# Altium PCB E4_TPF.PcbDoc
Units mil, origin at the board's own origin, x right, y up, seen from the top; angles counter-clockwise.
Board outline 7890 x 4000 mil, 2 copper layers (Top Layer, Bottom Layer); 88 components, 47 nets, 254 pads, 28 vias.
Unrouted connection lines stored in the file: 1.
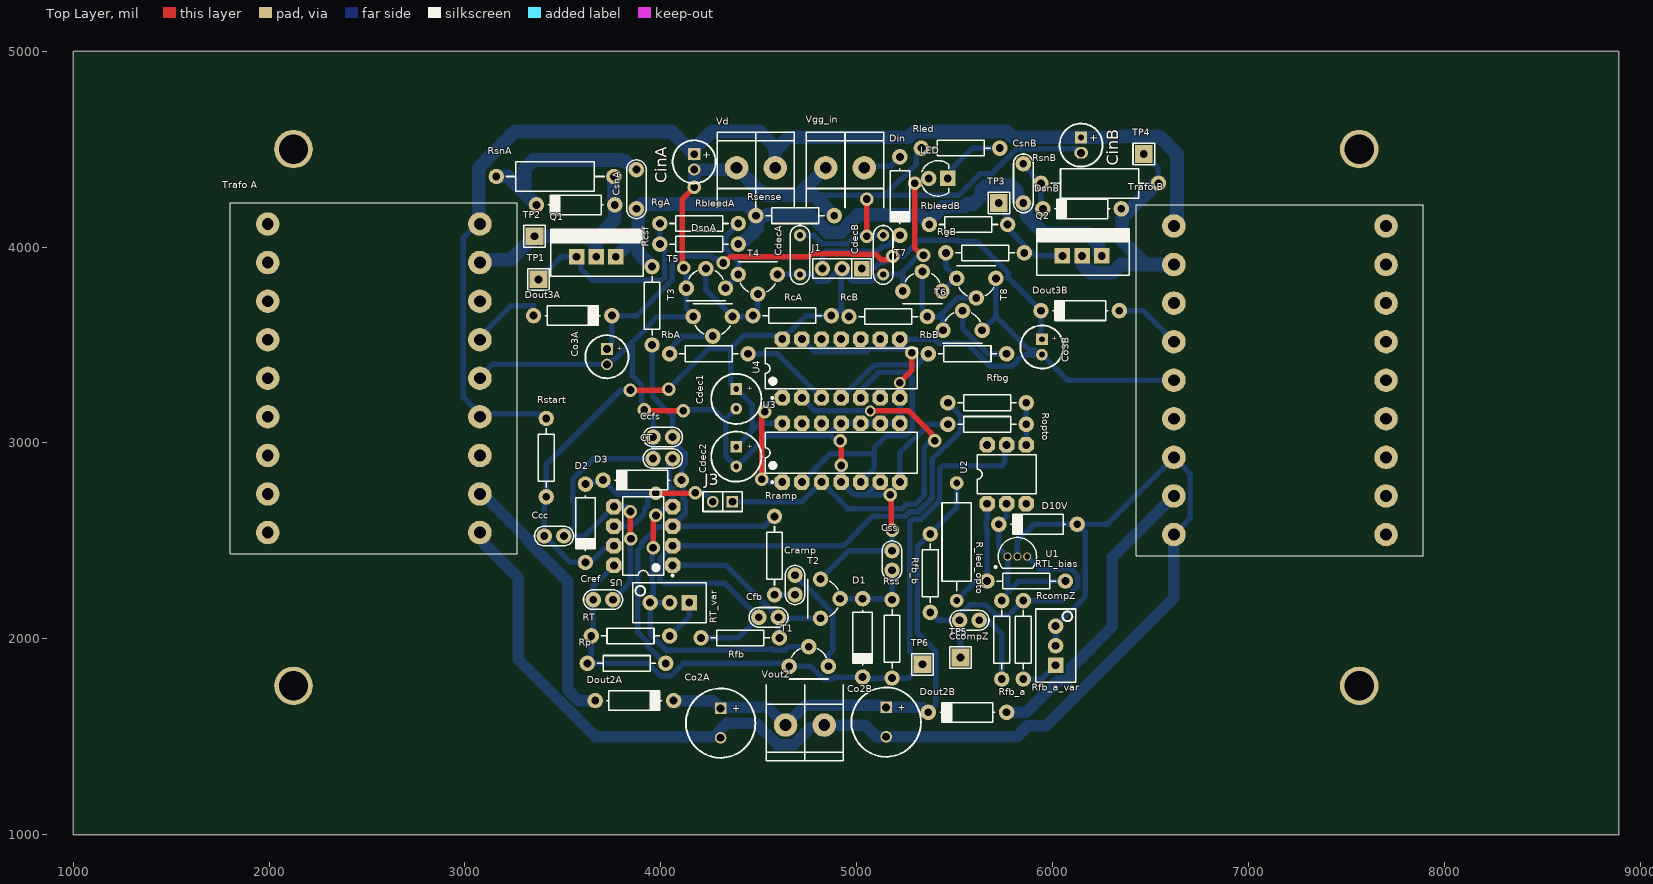
[diagram p0: Top Layer view]
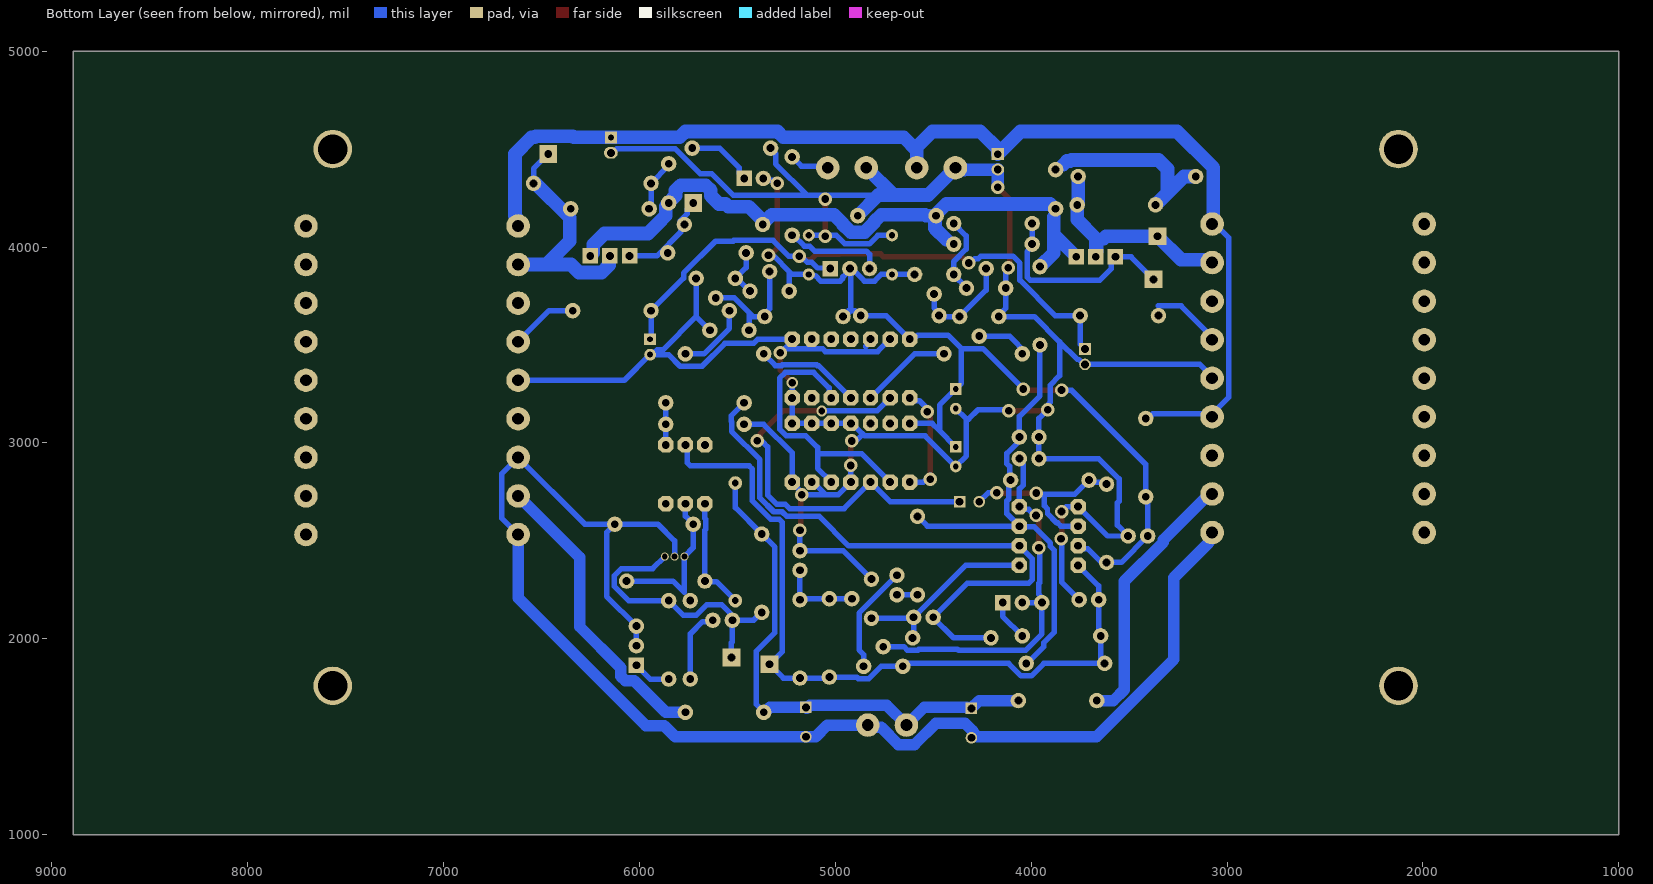
[diagram p1: Bottom Layer view, seen from below]
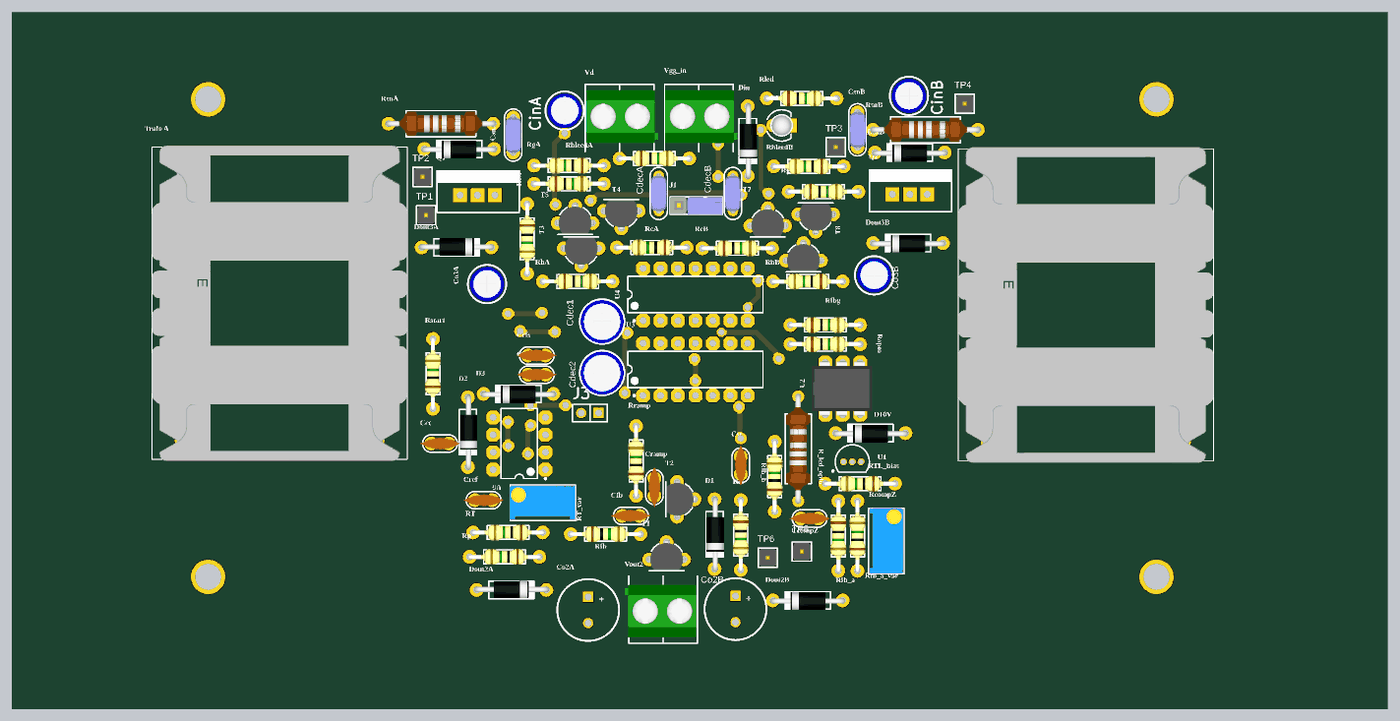
[diagram p2: 3D render of the assembled board from above, using the file's embedded part models]

## Layer stack, top to bottom
Top Solder: solder mask 0.4, Solder Resist, Dk 3.5
Top Layer: signal copper 1.4
Dielectric 1: dielectric 12.6, FR-4, Dk 4.8
Bottom Layer: signal copper 1.4
Bottom Solder: solder mask 0.4, Solder Resist, Dk 3.5

## Board outline
1000,1000 8890,1000 8890,5000 1000,5000

## Design rules (kind name [scope] priority, off if disabled: settings)
Clearance [All] p1: gap=10 ignorepadtopadclearanceinfootprint=FALSE except(0: Arc-Hole Track-Hole SMDPad-Hole THPad-Hole Via-Hole Fill-Hole Poly-Hole Region-Hole Text-Hole)
PolygonConnect [All] p1: connectstyle=Relief reliefconductorwidth=10 reliefentries=4 polygonreliefangle="90 Angle" airgapwidth=10
RoutingVias [All] p1: holewidth=28 width=50 viastyle="Through Hole" minholewidth=28 minwidth=50 maxholewidth=28 maxwidth=50
SolderMaskExpansion [All] p1: expansion=4 istentingtop=FALSE
Width [All] p1: maxlimit=70 minlimit=28 preferedwidth=28
30 further rules are at their usual default settings.

## Components (designator, comment, footprint, x,y, rotation, side; value= is the part's Value field where it differs from the comment)
Ccc "100n" CAP100 3455,2525 r180 top
Ccfs "100p" CAP100 4010,3030 r0 top
CcompZ "100p" CAP100 5575,2095 r180 top
Cdec1 "10u" CAP100RP2 4385,3225 r270 top
Cdec2 "10u" CAP100RP2 4385,2930 r270 top
CdecA "1u" CAP200#1 4710,3960 r270 top
CdecB "1u" CAP200#1 5135,3960 r270 top
Cfb "100p" CAP100 4550,2110 r0 top
CinA "10u" CAP100RP#1 4170,4435 r270 top
CinB "10u" CAP100RP#2 6145,4520 r270 top
Co2A "100u" CAP300RP 4305,1570 r270 top
Co2B "100u" CAP300RP 5150,1575 r270 top
Co3A "1u" CAP100RP#3 3725,3440 r270 top
Co3B "1u" CAP100RP#4 5945,3490 r270 top
Cramp "1n" CAP100 4685,2275 r270 top
Cref "100n" CAP100 3705,2200 r180 top
CsnA "680p" CAP200#2 3875,4295 r90 top
CsnB "680p" CAP200#2 5850,4325 r90 top
Css "10u" CAP100 5180,2400 r270 top
CT "1.5n" CAP100 4010,2920 r0 top
D1 "1N4148" DO41 5030,2005 r270 top
D2 "1N5817" DO41 3615,2590 r270 top
D3 "1N5817" DO41 3905,2810 r180 top
D10V "BZX84C10L" DO41 5925,2585 r180 top
Din "1N4001" DO41 5220,4260 r270 top
Dout2A "MUR460" DO41 3865,1685 r0 top
Dout2B "MUR460" DO41 5565,1625 r180 top
Dout3A "MUR110" DO41 3550,3650 r0 top
Dout3B "MUR110" DO41 6140,3675 r180 top
DsnA "1N5819" DO41 3565,4215 r180 top
DsnB "1N5819" DO41 6150,4195 r180 top
J1 "JUMPER" JUMPER3 4925,3890 r180 top
J3 "CON2" SIP2 4315,2700 r180 top
LED "LED" LED3 5415,4350 r0 top
Q1 "IRF540" "TO-220 V" 3670,3950 r0 top
Q2 "IRF540" "TO-220 V" 6150,3955 r0 top
R_led_opto "15k" RES600#1 5510,2195 r90 top
RbA "1k" RES400 4045,3455 r0 top
RbB "1k" RES400 5765,3455 r180 top
RbleedA "10k" RES400 3995,4015 r0 top
RbleedB "10k" RES400 5770,4115 r180 top
RcA "560" RES400 4870,3650 r180 top
RcB "560" RES400 4960,3645 r0 top
RcompZ "88.7k" RES400 5740,2195 r270 top
Rcsf "1k" RES400 3955,3900 r270 top
Rfb "1.8k" RES400 4205,2005 r0 top
Rfb_a "1.8k" RES400 5850,1795 r90 top
Rfb_a_var "100" "PRESET V" 6015,1965 r90 top
Rfb_b "82k" RES400 5375,2135 r90 top
Rfbg "4.7k" RES400 5465,3205 r0 top
RgA "33" RES400 4395,4120 r180 top
RgB "33" RES400 5455,3970 r0 top
Rled "1.5k" RES400 5330,4505 r0 top
Ropto "1k" RES400 5465,3095 r0 top
Rp "12k" RES400 4025,1875 r180 top
Rramp "100k" RES400 4580,2225 r90 top
Rsense "0.1" RES400 4485,4160 r0 top
RsnA "220" RES600#2 3160,4360 r0 top
RsnB "220" RES600#2 5940,4325 r0 top
Rss "47k" RES400 5180,2200 r270 top
Rstart "100k" RES400 3415,2725 r90 top
RT "5.6k" RES400 4045,2015 r180 top
RT_var "5k" "PRESET V" 4045,2185 r180 top
RTL_bias "1k" RES400 6065,2295 r180 top
T1 "BC547B" TO92 4755,1910 r180 top
T2 "BC557B" TO92 4865,2205 r90 top
T3 "BC547B" TO92 4265,3595 r0 top
T4 "2N2222" TO92 4495,3810 r0 top
T5 "2N2905A" TO92 4230,3840 r180 top
T6 "BC547B" TO92 5540,3625 r180 top
T7 "2N2222" TO92 5335,3825 r180 top
T8 "2N2905A" TO92 5610,3790 r0 top
TP1 "TP" TPTH 3375,3835 r0 top
TP2 "TP" TPTH 3355,4055 r0 top
TP3 "TP" TPTH 5725,4225 r270 top
TP4 "TP" TPTH 6465,4475 r0 top
TP5 "TP" TPTH 5530,1905 r0 top
TP6 "TP" TPTH 5335,1870 r0 top
"Trafo A" "B66243B1018T001" B66243B1018T001 2535,3330 r270 top
"Trafo B" "B66243B1018T001" B66243B1018T001 7160,3320 r270 top
U1 "TL431ACZ" TO-92 5820,2420 r270 top
U2 "4N25" DIP6 5665,2690 r90 top
U3 "CD4013BE" N0014A 4920,2950 r90 top
U4 "CD4011BE" N0014A 4920,3380 r90 top
U5 "UC3843AN" P0008A 3910,2525 r180 top
Vd "BORNERA 2" BORNERA2 4485,4405 r270 top
Vgg_in "BORNERA 2" BORNERA2 4940,4405 r270 top
Vout2 "BORNERA 2" BORNERA2 4735,1560 r90 top

## Footprints (in the part's own frame and the unit in brackets; to place one, negate y for a bottom-side part, rotate by r counter-clockwise, add the part's x,y. Pads: shape width x height; smd on the part's side, far side on the other; paste and mask are expansions set on the pad)
B66243B1018T001 [mil]
  round 120 hole 60: 1(-787.4,-541.34) 2(-787.4,541.34) 3(-590.55,-541.34) 4(-590.55,541.34) 5(-393.7,-541.34) 6(-393.7,541.34) 7(-196.85,-541.34) 8(-196.85,541.34) 9(0,-541.34) 10(0,541.34) 11(196.85,-541.34) 12(196.85,541.34) 13(393.7,-541.34) 14(393.7,541.34) 15(590.55,-541.34) 16(590.55,541.34) 17(787.4,-541.34) 18(787.4,541.34)
  silkscreen extent -896,-732 896,732, body extent -906,-732 906,732, height 1795
BORNERA2 [mil] "Bornera con Tornillos 5mm separación"
  round 120 hole 60: 1(0,98.43) 2(0,-98.43)
  silkscreen extent -181,-197 205,197, body extent -148,-193 155,221, height 394
CAP100 [mil]
  oval 79.06x79 hole 40: 1(-50,0) 2(50,0)
  silkscreen extent -100,-50 100,50, body extent -115,-33 115,34, height 241
CAP100RP#1 [mil] "Body diameter 5mm"
  rect 60x65 hole 39: 1(-39.37,0)
  oval 60x65 hole 39: 2(39.37,0)
  silkscreen extent -110,-110 110,110, body extent -99,-99 99,100, height 454
CAP100RP#2 [mil] "Body diameter 5mm"
  rect 60x60 hole 30: 1(-39.37,0)
  oval 60x70 hole 40: 2(39.37,0)
  silkscreen extent -110,-110 110,110, body extent -99,-99 99,100, height 454
CAP100RP#3 [mil] "Body diameter 5mm"
  rect 59x59 hole 40: 1(-39.37,0)
  round 59 hole 40: 2(39.37,0)
  silkscreen extent -110,-110 110,110, body extent -99,-99 99,100, height 454
CAP100RP#4 [mil] "Body diameter 5mm"
  rect 60x60 hole 30: 1(-39.37,0)
  round 60 hole 30: 2(39.37,0)
  silkscreen extent -110,-110 110,110, body extent -99,-99 99,100, height 454
CAP100RP2 [mil] "Body diameter 6.5mm"
  rect 60x60 hole 30: 1(-50,0)
  round 60 hole 30: 2(50,0)
  silkscreen extent -128,-128 128,128, body extent -124,-125 126,125, height 454
CAP200#1 [mil]
  round 62 hole 32: 1(-100,0) 2(100,0)
  silkscreen extent -150,-50 150,50, body extent -110,-46 110,44, height 246
CAP200#2 [mil]
  oval 79.06x79 hole 40: 1(-100,0) 2(100,0)
  silkscreen extent -150,-50 150,50, body extent -110,-46 110,44, height 246
CAP300RP [mm]
  rect 1.5x1.5 hole 1.016: 1(-1.905,0)
  round 1.5 hole 1.016: 2(1.905,0)
  silkscreen extent -4.5,-4.5 4.5,4.5
DIP6 [mil]
  oct 79.06x79 hole 40: 1(0,0) 2(0,-100) 3(0,-200) 4(300,-200) 5(300,-100) 6(300,0)
  silkscreen extent 50,-250 250,50, body extent -5,-269 305,77, height 209
DO41 [mil]
  oval 79.06x79 hole 40: 1(-200,0) 2(200,0)
  silkscreen extent -140,-50 140,50, body extent -215,-47 215,54, height 80
JUMPER3 [mil]
  rect 79.06x79 hole 40: 1(-100,0)
  oval 79.06x79 hole 40: 2(0,0) 3(100,0)
  silkscreen extent -150,-50 150,50, body extent -150,-51 150,50, height 636
LED3 [mil]
  oval 79.06x79 hole 40: 1(-48,0)
  rect 79.06x79 hole 40: 2(49,0)
  silkscreen extent -84,-90 54,90, body extent -65,-64 65,65, height 19
N0014A [mil] "DIP, 14-Leads, Body 19.7x6.6mm, Pitch 2.54mm"
  oct 79.06x79 hole 40: 1(-150,300) 2(-150,200) 3(-150,100) 4(-150,0) 5(-150,-100) 6(-150,-200) 7(-150,-300) 8(150,-300) 9(150,-200) 10(150,-100) 11(150,0) 12(150,100) 13(150,200) 14(150,300)
  silkscreen extent -155,-388 104,388, body extent -155,-388 155,388, height 200
P0008A [mil] "DIP, 8-Leads, Body 10.15x6.6mm, Pitch 2.54mm"
  oct 79.06x79 hole 40: 1(-150,150) 2(-150,50) 3(-150,-50) 4(-150,-150) 5(150,-150) 6(150,-50) 7(150,50) 8(150,150)
  silkscreen extent -155,-201 104,206, body extent -155,-200 155,200, height 200
"PRESET V" [mil]
  rect 79.06x79 hole 40: 1(-100,0)
  oval 79.06x79 hole 40: 2(0,0) 3(100,0)
  silkscreen extent -188,-102 188,102, body extent -185,-95 190,95, height 455
RES400 [mil]
  oval 79.06x79 hole 40: 1(0,0) 2(400,0)
  silkscreen extent 50,-40 350,40, body extent -12,-45 412,46, height 96
RES600#1 [mil]
  round 70 hole 35: 1(0,0) 2(600,0)
  silkscreen extent 50,-75 550,75, body extent -16,-68 616,70, height 141
RES600#2 [mil]
  oval 79.06x79 hole 40: 1(0,0) 2(600,0)
  silkscreen extent 50,-75 550,75, body extent -16,-68 616,70, height 141
SIP2 [mm]
  rect 1.5x1.5 hole 1.016: 1(-1.27,0)
  round 1.5 hole 1.016: 2(1.27,0)
  silkscreen extent -2.54,-1.27 2.54,1.27
TO92 [mil]
  oval 79.06x79 hole 40: 1(0,-50) 2(100,50) 3(-100,50)
  silkscreen extent -100,-39 100,115, body extent -110,-61 110,110, height 315
TO-92 [mil] "TO, Flat Index; 3 In-Line, Axial Leads; Body Dia. 4.7mm; Lead Dia. 0.56 mm (max)"
  round 41 hole 30: 1(0,-50) 2(0,0) 3(0,50)
  silkscreen extent -98,-116 59,98, body extent -98,-98 59,98, height 195
"TO-220 V" [mil]
  rect 79.06x79 hole 40: 1(-100,0) 2(0,0) 3(100,0)
  silkscreen extent -232,-100 240,139, body extent -197,-79 197,118, height 709
TPTH [mm]
  rect 2.3x2.3 hole 1.016: 1(0,0)
  silkscreen extent -1.4,-1.4 1.4,1.4, body extent -1.27,-1.27 1.27,1.27, height 6.04

## Part data
Ccc Ccfs CcompZ CdecA CdecB Cfb Cramp Cref CsnA CsnB Css CT: library part CAP
Cdec1 Cdec2 CinA CinB Co2A Co2B Co3A Co3B: library part CAPPOL
D1 Din Dout2A Dout2B Dout3A Dout3B: library part DIODO
D2 D3 D10V: library part "DIODO ZENER"
DsnA DsnB: library part "DIODO SCHOTTKY"
J1: library part JUMPER3
Q1 Q2: library part "MOSFET N"
R_led_opto RbA RbB RbleedA RbleedB RcA RcB RcompZ Rcsf Rfb Rfb_a Rfb_b Rfbg RgA RgB Rled Ropto Rp Rramp Rsense RsnA RsnB Rss Rstart RT RTL_bias: library part RES
Rfb_a_var RT_var: library part PRESET
T1 T3 T4 T6 T7: library part "TRANSISTOR NPN"
T2 T5 T8: library part "TRANSISTOR PNP"
"Trafo A" "Trafo B": "Inductor", Manufacturer_Name=TDK, Mouser Part Number=N/A, Arrow Part Number=B66243B1018T001, Arrow Price/Stock=https://www.arrow.com/en/products/b66243b1018t001/epcos-tdk, Datasheet Link=https://product.tdk.com/system/files/dam/doc/product/ferrite/ferrite/ferrite-acc/data_sheet/80/db/fer/e_42_21_20.pdf, Height=51mm, Manufacturer_Part_Number=B66243B1018T001, Mouser Price/Stock=https://www.mouser.co.uk/ProductDetail/EPCOS-TDK/B66243B1018T001?qs=W0yvOO0ixfHL1dNOx1DZxg%3D%3D
U1: library part CMP-0242-00006-1, "Programmable Voltage Reference, 2.5 to 36V, 3-Pin TO-92", ComponentLink1Description="Manufacturer URL", ComponentLink1URL=http://www.st.com, ComponentLink2Description=Datasheet, ComponentLink2URL=http://www.st.com/internet/com/TECHNICAL_RESOURCES/TECHNICAL_LITERATURE/DATASHEET/CD00000986.pdf, DatasheetVersion=Oct-2011, PackageDescription="TO, Flat Index; 3 In-Line, Axial Leads; Body Dia. 4.7mm; Lead Dia. 0.56 mm (max)", PackageReference=TO-92, PackageVersion=2011
U3: library part CMP-1619-00744-2, "CMOS Dual D-Type Flip Flop, N0014A, TUBE", F @ Nom Voltage(Max)(Mhz)=8, Generic Part Number=CD4013B, ICC @ Nom Voltage(Max)(mA)=0.06, Manufacturer="Texas Instruments", Operating Temperature Range(C)="-55 to 125", Rating=Military, tpd @ Nom Voltage(Max)(ns)=130, Voltage(Nom)(V)=10, 3-State Output=No, Bits(#)=2, Code_JEDEC=MS-001, DatasheetVersion=SCHS023D, Input Type=CMOS, Output Drive (IOL/IOH)(Max)(mA)=1.5/-1.5, Output Logic=Inverted,Non-inverted, Output Type=CMOS, PackageReference=N0014A, Schmitt Trigger=No, Technology Family=CD4000, VCC(Max)(V)=18, VCC(Min)(V)=3
U4: library part CMP-1627-00488-2, "CMOS Quad 2-Input NAND Gate, N0014A, TUBE", F @ Nom Voltage(Max)(Mhz)=8, Generic Part Number=CD4011B, ICC @ Nom Voltage(Max)(mA)=0.015, Manufacturer="Texas Instruments", Operating Temperature Range(C)="-55 to 125", Rating=Military, Voltage(Nom)(V)=10, Bits(#)=4, Code_JEDEC=MS-001, DatasheetVersion=SCHS021D, Input Type=CMOS, Output Drive (IOL/IOH)(Max)(mA)=1.5/-1.5, Output Type=CMOS, PackageReference=N0014A, Schmitt Trigger=No, Technology Family=CD4000, VCC(Max)(V)=18, VCC(Min)(V)=3
U5: library part CMP-0319-00327-2, "PWM Controller with Current Control, 100 % Duty Cycle, 0 to +70 degC, 8-pin PDIP (P), Green (RoHS & no Sb/Br)", Frequency(Max)(kHz)=450, Manufacturer="Texas Instruments", Rating=Catalog, Code_JEDEC=MS-001-BA, ComponentLink1Description=Datasheet, ComponentLink1URL=http://www.ti.com/general/docs/lit/getliterature.tsp?genericPartNumber=UC3843A&fileType=pdf, Control Method=Current, DatasheetVersion=SLUS224C, Duty Cycle(Max)(%)=100, Eco-Plan="Green (RoHS & no Sb/Br)", Mounting Technology="Through Hole", PackageDescription="8-Pin Plastic Dual-In-Line Package, Row Spacing 7.62 mm, Pitch 2.54 mm", PackageReference=P0008A, PackageVersion="revE, Apr-2010", PartNumber=UC3843AN, Regulated Outputs(#)=1, SubFamily="PWM Controller", Topology="Boost, Buck, Flyback, Forward", UVLO Thresholds On/Off(V)=8.4/7.6

## Free pads (board coordinates)
  round 196.85 hole 150.11: 2(2125,1760) 2(2125,4500) 2(7565,1760) 2(7565,4500)

## Via types
v1: diameter 69, hole 39, Top Layer to Bottom Layer, 26 vias
v2: diameter 59, hole 39, Top Layer to Bottom Layer, 1 vias
v3: diameter 55, hole 35, Top Layer to Bottom Layer, 1 vias

## Nets (pads, with @x,y where several pads share a name; then routed paths per layer and width w, separated by ;. In a path a pad name is that pad's centre, name@x,y a point inside that pad or via, vN(x,y) a via of type N, cw(c..) or ccw(c..) an arc to the next point about the centre after c; other vN are vias at no path point)
-Q: U3.2 U3.5 U4.5 | length 1482.2
  Bottom Layer w28: U3.2 4865,2945 5090.31,2945 ; U3.5 5090.31,2870.31 5090.31,2945 ; U4.5 5031.34,3241.34 5031.34,3281.34 5110,3360 5255,3360 5283.5,3331.5 5283.5,3070.28 5249.69,3036.47 5149.69,3036.47 5090.31,2977.09 5090.31,2945
GND: "Trafo A.10" "Trafo B.9" Ccc.1 Ccfs.1 Cdec1.2 Cdec2.2 CdecA.1 CdecB.1 CinA.2 CinB.2 Co3A.2 Co3B.2 Cref.1 Css.1 CT.1 Rled.1 Ropto.1 Rsense.2 T2.2 T3.3 T5.2 T6.3 T8.2 U3.4 U3.6 U3.7 U3.8 U3.9 U3.10 U3.11 U4.7 U4.8 U4.9 U4.12 U4.13 U5.5 Vd.2 Vgg_in.2 | length 14679.4
  Top Layer w28: v1(3845,2650) 3844.24,2649.24 3844.24,2514.12 v1(3847.25,2511.11) ; v1(3915,3170) 3920,3165 v1(4115,3165) ; v1(4117.73,3895) 4110,3902.73 4110,4245 v1(4170,4305) ; v1(4915,3010) 4920,3005 v1(4920,2885) ; v1(5050,4055) v1(5050,4245) ; v1(5170,2735.77) 5175,2730.77 5175,2560 v1(5180,2555) ; v2(5220,3306.5) 5220,3310 5280,3370 v1(5280,3460)
  Bottom Layer w28: 3076.34,3345 3083.11,3345 3138.74,3400.63 Co3A.2 3731.66,3400.63 3756.9,3425.87 3764.44,3425.87 3854.29,3515.71 ; Cref.1 3843.47,2288.47 3843.47,2507.34 v1(3847.25,2511.11) ; v1(3845,2650) 3821.34,2673.66 3761.34,2673.66 U5.5 3610,2525 Ccc.1 3560,2580 3560,2693.91 3551.5,2702.41 3551.5,2816.33 3655.17,2920 CT.1 3960,3125 3907.16,3177.84 3907.16,3203.25 3903.5,3206.9 3903.5,3294.23 3854.29,3343.45 3854.29,3515.71 ; v1@4114.67,3170 4115.46,3169.21 4134.77,3169.21 4135.56,3170 4270,3170 4319,3121 4331,3121 ; v1(4117.73,3895) 4117.73,3883.91 4130,3871.64 4130,3686.9 4165,3651.9 T3.3 3983.57,3645 3854.29,3515.71 ; Cdec1.2 4331,3121 ; 4510,4281.4 4510,4281.57 ; CdecA.1 4782.03,4060 4825.53,4016.5 4950.66,4016.5 4994.16,4060 CdecB.1 ; U4.13 4783.53,3466.47 5049.69,3466.47 5063.22,3480 5120,3480 ; 4780,4265 5020,4265 ; T2.2 4960,2450 Css.1 v1(5180,2555) ; U4.12 4820,3518.42 4843.84,3494.59 4843.84,3491.16 4845,3490 ; 4859.11,3045.89 v1@4912,2993 ; v1(4920,2885) U3.4 4983.53,2736.47 5049.69,2736.47 ; v1(5050,4245) 5040,4245 5020,4265 ; U3.6 5113.22,2800 5049.69,2736.47 ; U4.9 5120,3480 ; v2(5220,3306.5) U3.8 U3.9 U3.10 U3.11 4913.22,3100 4849.69,3036.47 4541.47,3036.47 Cdec2.2 4331,2934 4331,3121 ; v1(5280,3460) v1@5260,3480 ; Rled.1@5304.5,4477.09 5304.5,4424.97 5144.53,4265 ; Rled.1@5325.4,4505 Rled.1 ; Ropto.1 5365,3095 5220,2950 U3.7 5220,2797.07 5174.21,2751.28 5174.21,2739.98 v1(5170,2735.77) 5169.3,2736.47 5049.69,2736.47 ; T6.3 5710,3645 ; T8.2 5710,3645 ; CinB.2 6136.34,4480.63 6115.97,4501 5815.83,4501 5689.11,4374.28 5630.86,4374.28 5521.59,4265 5144.53,4265 ; 6618.66,3320 6075.63,3320 Co3B.2 Co3B.2@5936.34,3450.63 ; 5020,4265 5050,4265 5144.53,4265 ; 5120,3480 v1@5260,3480 ; v1@5260,3480 5220,3520 U4.8 5395.17,3530 5416.96,3508.21 5563.21,3508.21 5679.93,3391.5 5791.33,3391.5 5850.46,3450.63 Co3B.2@5936.34,3450.63 ; 5710,3645 5879.63,3475.37 5909.63,3475.37 5918.37,3466.63 5920.34,3466.63 Co3B.2@5936.34,3450.63
  Bottom Layer w65: v1(4170,4305) CinA.2 ; CinA.2@4185,4395 Vd.2@4341.22,4395
  Bottom Layer w70: Vd.2@4341.22,4395 4341.65,4395.43 4377.01,4395.43 Vd.2 4510,4281.57 ; 4510,4281.4 4526.4,4265 4701.57,4265 ; Vgg_in.2 4701.57,4265 ; Rsense.2 4780,4265 4701.57,4265 ; Rled.1@5330,4502.59 Rled.1
GND_OUT: "Trafo A.18" "Trafo B.13" "Trafo B.17" Co2A.2 Co2B.2 D10V.1 Rfb_a_var.2 Rfb_a_var.3 U1.2 Vout2.2 | length 7267
  Bottom Layer w28: 3076.34,2557.6 3093.94,2539.99 3093.94,2491.06 ; Co2B.2 5155.94,1505.94 5165,1505.94 5180.94,1505.94 ; U1.2 5820,2500 5905,2585 D10V.1 ; Rfb_a_var.2 Rfb_a_var.3 6166.53,2216.53 6166.53,2543.1 6125,2584.63 D10V.1 ; 6618.66,2532.6 6702.66,2616.6 6702.66,2842.3 6618.66,2926.3 6277.36,2585 D10V.1
  Bottom Layer w59: 3093.94,2491.06 3272.5,2312.5 3272.5,1894.92 3666.45,1500.97 4275.89,1500.97 4287.46,1512.54 4299.03,1524.11 4299.03,1531.45 4337.57,1569.99 4379.99,1569.99 4485.86,1570 4595.36,1460.5 4677.79,1460.5 4765.62,1548.33 4821.75,1548.33 Vout2.2 5040,1560 5099.99,1500.01 Co2B.2 5180.94,1500 5816.71,1500 5872.71,1556 5966,1556 6618.66,2208.66 6618.66,2532.6
NetCcfs_2: Ccfs.2 D3.1 Rcsf.2 Rp.1 Rramp.2 U5.3 | length 2454.6
  Bottom Layer w28: Rcsf.2 3955,3240 4060,3135 Ccfs.2 4069.79,3020.21 4069.79,3000.04 4123.53,2946.3 4123.53,2893.7 4110,2880.17 4110,2815 D3.1 4114.79,2800.21 4114.79,2768.31 4115,2768.1 4115,2713.22 4123.53,2704.69 4123.53,2638.53 U5.3 ; Rp.1@4022.5,1872.5 3935,1960 3935,1981.43 3881.47,2034.96 3881.47,2451.47 3901.5,2471.5 3901.5,2489.23 3983.43,2571.16 4056.16,2571.16 U5.3 ; Rramp.2 4530,2575 U5.3
NetCcompZ_1: CcompZ.1 RcompZ.2 | length 374
  Bottom Layer w28: CcompZ.1 5632.14,2087.86 5677.14,2087.86 5740,2025 RcompZ.2
NetCcompZ_2: CcompZ.2 Rfb_a.2 Rfb_b.1 TP5.1 U1.3 | length 1463.8
  Bottom Layer w28: Rfb_b.1@5378.23,2144.7 5375,2147.93 Rfb_b.1 5376.9,2135 5416.9,2095 CcompZ.2 ; TP5.1 5530,1980 5525,1985 CcompZ.2 ; U1.3 5931.5,2358.5 6091.33,2358.5 6128.53,2321.3 6128.53,2268.7 6054.83,2195 Rfb_a.2 5775,2120 5710,2120 5655,2175 5580,2175 5534.79,2129.79 5534.79,2104.79 CcompZ.2
NetCfb_2: Cfb.2 Rfb.2 T2.3 U5.1 | length 973.9
  Bottom Layer w28: U5.1 4335,2375 Cfb.2 ; Rfb.2 4600,2010 Cfb.2 ; T2.3 4605,2105 Cfb.2
NetCramp_1: Cramp.1 T1.3 | length 554.9
  Bottom Layer w28: Cramp.1 4878.5,2131.5 4878.5,1943.5 4855,1920 T1.3
NetCramp_2: Cramp.2 Rramp.1 | length 105
  Bottom Layer w28: Rramp.1 Cramp.2
NetCsnA_2: CsnA.2 DsnA.2 RsnA.1 | length 997.8
  Bottom Layer w28: 3817.33,4438.9 3820.83,4435.4 ; 3836.23,4420 3861.23,4395 CsnA.2
  Bottom Layer w70: RsnA.1 3220,4360 3303.77,4276.23 ; DsnA.2 3303.77,4276.23 ; 3817.33,4438.9 3800.63,4438.9 3795.03,4444.5 3350.38,4444.5 3303.77,4397.89 3303.77,4276.23 ; 3820.83,4435.4 3836.23,4420
NetCsnB_2: CsnB.2 DsnB.2 RsnB.1 | length 296.4
  Bottom Layer w28: CsnB.2 5850,4415 RsnB.1 5940,4193.77 5950,4183.77 DsnB.2@5950,4170
NetCss_2: Css.2 D1.1 Rss.1 T2.1 | length 417.1
  Bottom Layer w28: T2.1 D1.1 5175,2205 Rss.1 Css.2
NetCT_2: CT.2 RT_var.2 RT_var.3 T1.1 U5.4 | length 1941.1
  Top Layer w28: v1(3960,2465) 3960,2603.91 3975,2618.91 v1(3975,2630)
  Bottom Layer w28: v1(3960,2465) 3957,2462 3957,2285.66 3960,2282.66 3960,2226.9 3954.79,2221.69 3954.79,2194.79 RT_var.3 ; v1(3975,2630) 3981.48,2630 4012.53,2661.05 4046.05,2661.05 U5.4 4060,2765.17 4041.47,2783.7 4041.47,2887.7 4060,2906.23 CT.2 ; RT_var.2 RT_var.3 ; T1.1 4649.83,1960 4631.33,1941.5 4578.67,1941.5 4572.53,1947.64 4376.09,1947.64 4369.94,1941.5 4028.67,1941.5 3945,2025.17 RT_var.3
NetD10V_2: D10V.2 RcompZ.1 RTL_bias.1 U1.1 U2.2 | length 807.3
  Bottom Layer w28: U2.2 5765,2626.9 5725,2586.9 D10V.2 5725,2465 U1.1 5770,2236.93 5828.07,2295 RTL_bias.1
NetDin_1: Din.1 Vgg_in.1 | length 205.3
  Bottom Layer w28: Vgg_in.1 5046.76,4413.34 5173.34,4413.34 Din.1@5220.68,4460.68
NetDin_2: Din.2 J1.3 | length 507.7
  Bottom Layer w28: J1.3 4825,3962.1 4841.4,3978.5 5104.77,3978.5 5130.79,4004.52 5157.3,4004.52 5212.78,4060 Din.2
NetDout2A_1: "Trafo A.16" Dout2A.1 | length 1363.1
  Bottom Layer w59: 3076.34,2754.45 3325.97,2504.81 3325.97,2492.28 3525,2293.25 3525,1740 3580,1685 Dout2A.1
NetDout2B_1: "Trafo B.15" Dout2B.1 | length 1542.9
  Bottom Layer w59: Dout2B.1 5865,1625 6025.97,1785.97 6070.86,1785.97 6094,1809.11 6094,1851.71 6305,2062.71 6305,2415.79 6618.66,2729.45
NetDout3A_1: "Trafo A.8" Dout3A.1 | length 339.2
  Bottom Layer w28: 3076.34,3541.85 3234.49,3700 3350,3700
NetDout3B_1: "Trafo B.7" Dout3B.1 | length 344.2
  Bottom Layer w28: Dout3B.1 6460.51,3675 6618.66,3516.85
NetDsnA_1: "Trafo A.4" DsnA.1 Q1.2 RsnA.2 TP2.1 | length 1153.7
  Bottom Layer w28: 3630,4042.46 3644.47,4027.99 Q1.2@3644.47,3975.5 ; DsnA.1@3760,4220 DsnA.1
  Bottom Layer w70: 3076.34,3935.55 3235.55,3935.55 TP2.1 3617.46,4055 3630,4042.46 ; Q1.2 Q1.2@3670,3975.5 ; Q1.2@3670,3954.5 3670,4045 3765,4140 DsnA.1 ; DsnA.1@3760,4220 RsnA.2
NetDsnB_1: "Trafo B.3" DsnB.1 Q2.2 RsnB.2 TP4.1 | length 1273
  Bottom Layer w28: TP4.1 6540,4400 RsnB.2 RsnB.2@6530,4325
  Bottom Layer w70: Q2.2 6154.53,3950.5 6154.53,3907.81 6191.83,3870.5 6308.17,3870.5 6348.22,3910.55 6475,3910.55 ; RsnB.2@6530,4325 6355,4150 6355,4030.55 6475,3910.55 ; 6618.66,3910.55 6475,3910.55
NetJ3_1: J3.1 U3.3 U4.2 U4.6 | length 2199.6
  Top Layer w28: v3(5068.78,3163.53) 5266.47,3163.53 5382.54,3047.46 5382.54,3038.55 5398.63,3022.46 v1(5398.63,3011.37)
  Bottom Layer w28: J3.1 4720,2700 U3.3 4955,2665 5233.15,2665 5254.92,2686.77 5298.03,2686.77 5345,2733.74 5345,2980.01 5368.51,3003.52 5390.79,3003.52 v1(5398.63,3011.37) ; U4.2 4786.47,3163.53 v3(5068.78,3163.53)
NetLED_2: LED.2 Rled.2 | length 347.2
  Bottom Layer w28: LED.2 5489.53,4375.5 5489.53,4404.53 5590,4505 Rled.2
NetQ1_1: Q1.1 RbleedA.1 RgA.2 TP1.1 | length 1056.5
  Bottom Layer w28: TP1.1 3490,3950 Q1.1 3591.21,3928.79 3591.21,3888.79 3650,3830 4003.6,3830 4020,3846.4 4020,3976.23 3995,4001.23 RgA.2
NetQ2_1: Q2.1 RbleedB.1 RgB.2 TP3.1 | length 488.7
  Bottom Layer w28: TP3.1 5756.28,4193.72 5756.28,4168.72 RbleedB.1@5790.01,4134.99 ; RbleedB.1 5770,4101.23 5789.64,4081.58 5789.64,4075.36 5910,3955 Q2.1 ; RgB.2@5855,3956.23 RgB.2
NetR_led_opto_1: R_led_opto.1 RTL_bias.2 U2.1 | length 594.3
  Bottom Layer w28: R_led_opto.1 5606.73,2291.73 5661.73,2291.73 RTL_bias.2 5665,2555.17 5661.47,2558.7 5661.47,2611.3 5665,2614.83 U2.1
NetRbA_1: RbA.1 T3.1 | length 282.3
  Bottom Layer w28: RbA.1@4020,3455 4110,3545 T3.1
NetRbA_2: RbA.2 U4.3 | length 493.2
  Bottom Layer w28: RbA.2@4420,3455 4595,3455 U4.3
NetRbB_1: RbB.1 T6.1 | length 368.7
  Bottom Layer w28: T6.1 5540,3585.17 5670.17,3455 RbB.1
NetRbB_2: RbB.2 U4.4 | length 540.7
  Bottom Layer w28: U4.4 5085,3395 5091.26,3395 5094.26,3398 5270.74,3398 5273.74,3395 5305,3395 RbB.2
NetRcA_2: RcA.2 T3.2 T4.1 T5.1 | length 528.3
  Bottom Layer w28: T5.1 4230,3780 T3.2 4465,3645 RcA.2 4470,3663.77 4495,3688.77 T4.1
NetRcB_2: RcB.2 T6.2 T7.1 T8.1 | length 619.5
  Bottom Layer w28: T7.1 5335,3683.77 5360,3658.77 RcB.2 5420.17,3645 5440,3664.83 ; T6.2 5440,3664.83 ; T8.1 5515.17,3740 5440,3664.83
NetRfb_a_1: Rfb_a.1 Rfb_a_var.1 | length 194
  Bottom Layer w28: Rfb_a.1 5945,1795 Rfb_a_var.1@5989.47,1839.47 ; Rfb_a_var.1@5989.5,1839.47 Rfb_a_var.1
NetRfbg_2: Rfbg.2 Ropto.2 U2.4 | length 215
  Bottom Layer w28: U2.4 Ropto.2 Rfbg.2
NetRT_1: RT.1 RT_var.1 | length 211.4
  Bottom Layer w28: RT.1 4145,2115 RT_var.1
Q: U3.1 U4.1 | length 594.1
  Top Layer w28: v1(4515,2815) 4515,3139.05 4530,3154.05 v1(4530,3160)
  Bottom Layer w28: v1@4515,2835 4550,2800 U3.1 ; v1@4522.5,3167.5 4571.16,3216.16 4606.16,3216.16 U4.1
Vcontrol: D2.1 D3.2 J3.2 U5.6 | length 977.7
  Top Layer w28: v1(3974.25,2744.25) 4174.25,2744.25 v1(4175,2745)
  Bottom Layer w28: D2.1@3640,2790 3649.79,2799.79 3680.96,2799.79 3691.17,2810 D3.2 3776.5,2738.5 3921.5,2738.5 ; U5.6 3848.6,2575 3865.1,2591.5 3869.23,2591.5 3916.5,2638.77 3916.5,2664 3932.04,2679.54 3932.04,2727.96 3921.5,2738.5 ; v1(3974.25,2744.25) 3968.5,2738.5 3932.04,2738.5 3921.5,2738.5 ; v1(4175,2745) 4220,2745 J3.2
Vd: "Trafo A.2" "Trafo A.12" "Trafo B.1" CinA.1 CinB.1 Rstart.2 Vd.1 | length 6034.7
  Bottom Layer w28: 3076.34,4132.4 2992.34,4048.4 2992.34,3232.15 3076.34,3148.15 3378.08,3148.15 3401.23,3125 Rstart.2 ; 4583.43,4493.43 4583.43,4511.57
  Bottom Layer w70: 3076.34,4132.4 3070,4138.74 3070,4405 3255,4590 4054.37,4590 CinA.1 4170,4500 4260,4590 4505,4590 4583.43,4511.57 ; Vd.1 4583.43,4493.43 4650,4560 5265.47,4560 5294.97,4589.5 5765.03,4589.5 5794.53,4560 6334.32,4560 6339.6,4565.28 6528.92,4565.28 6534.19,4560 6549.83,4560 6635,4474.83 6635,4159.1 6628.23,4152.32 6628.23,4116.97 6618.66,4107.4
VgA: RgA.1 T4.3 T5.3 | length 409.6
  Bottom Layer w28: T5.3 4330,3792.43 4395,3857.43 T4.3 4395,3925.17 4331.47,3988.7 4331.47,4056.47 RgA.1
VgB: RgB.1 T7.3 T8.3 | length 254.7
  Bottom Layer w28: T7.3 5437.43,3775 5502.43,3840 T8.3 5455,3895 RgB.1
Vgg: Ccc.2 Cdec1.1 Cdec2.1 CdecA.2 CdecB.2 D2.2 J1.2 LED.1 RcA.1 RcB.1 Rstart.1 T4.2 T7.2 U3.14 U4.14 U5.7 | length 5120.4
  Top Layer w28: v1(3845,3270) 4035,3270 v1(4040,3275) ; v1(5295,4325) 5295,3995.72 5331.9,3958.82 v1(5340.58,3958.82)
  Bottom Layer w28: Rstart.1@3405,2739.82 3405.24,2739.58 3405.24,2701.41 3405,2701.17 Ccc.2 3540,2390 D2.2 ; Rstart.1 3415,2890 3793.91,3268.91 3843.91,3268.91 v1(3845,3270) ; D2.2@3640,2390 3711.16,2461.16 3746.16,2461.16 U5.7 ; v1@4025,3275 v1(4040,3275) 4246.3,3481.3 4356.47,3481.3 ; Cdec2.1 4467.5,3062.5 ; T4.2 CdecA.2 4765.17,3860 4798.67,3826.5 4851.33,3826.5 4914.83,3890 J1.2@4920,3890 ; U3.14 4505,3100 4467.5,3062.5 ; 4930.95,3675.95 4920,3686.9 J1.2@4920,3890 ; RcB.1@4950,3645 4920,3675 4900.17,3675 4875.17,3650 4740,3650 U4.14 4606.02,3543.98 4584.12,3543.98 4578.1,3550 4425.17,3550 4356.47,3481.3 ; T7.2 5235,3875 ; v1(5295,4325) 5300.95,4325 5316.05,4340.1 5325.07,4340.1 5325.21,4340.24 5357.24,4340.24 LED.1 ; v1(5340.58,3958.82) 5332.74,3950.97 5310.97,3950.97 5235,3875 ; 4356.47,3481.3 4356.47,3303.53 Cdec1.1 4467.5,3192.5 4467.5,3062.5 ; J1.2@4920,3890 J1.2 4925,3884.57 4961.47,3848.1 4961.47,3840.56 4975.53,3826.5 5074.47,3826.5 5101.46,3853.49 5128.49,3853.49 CdecB.2 5220,3860 5235,3875
Vo2: Co2A.1 Co2B.1 Dout2A.2 Dout2B.2 R_led_opto.2 Rfb_b.2 Vout2.1 | length 2718.7
  Bottom Layer w28: Dout2B.2 5365,1627.63 5404.28,1666.9 5404.28,1935.72 5308,2032 5308,2468 Rfb_b.2 5510,2670 R_led_opto.2
  Bottom Layer w59: Dout2A.2 4265,1685 Co2A.1 ; Co2A.1 Co2A.1 4322.36,1645.03 4327.34,1650 4546.57,1650 Vout2.1 4736.57,1660 5130,1660 Co2B.1@5145,1645 ; Co2B.1 5334.56,1650 5359.56,1625 Dout2B.2
Vo3: Co3A.1 Co3B.1 Dout3A.2 Dout3B.2 J1.1 | length 3136.2
  Top Layer w28: v1(4318.72,3918.72) 4322.84,3918.72 4355.62,3951.5 4755,3951.5 4768.5,3965 4979.44,3965 4980.23,3964.21 5095.79,3964.21 5123.78,3936.22 5156.6,3936.22 5172.78,3952.4 v1(5183.87,3952.4)
  Bottom Layer w28: Co3A.1 3750,3504.37 Dout3A.2 3877.34,3650 4058,3830.66 4058,3918 4093.5,3953.5 4256.33,3953.5 4270.62,3939.21 4287.13,3939.21 4307.62,3918.72 v1(4318.72,3918.72) ; J1.1 5027.91,3892.91 5090.13,3892.91 5119.01,3921.79 5141.79,3921.79 5152.04,3932.04 5152.42,3932.04 5172.78,3952.4 v1(5183.87,3952.4) ; v1@5180,3960 5187.64,3952.36 5236.11,3952.36 5317.25,4033.5 5517.5,4033.5 5521,4030 5609.83,4030 5773.53,3866.3 5773.53,3841.47 Dout3B.2 5940,3534.37 Co3B.1
Vo_comp: Cfb.1 Rfb.1 Rfbg.1 U5.2 | length 3121.8
  Bottom Layer w28: Rfb.1 4395,2005 Cfb.1 4325,2285 4011.4,2285 3995,2301.4 3995,2410 U5.2 4931.26,2475 5081.26,2625 5246.89,2625 5270.66,2648.77 5313.77,2648.77 5385,2720 5385,2915 5528.53,3058.53 5528.53,3108.53 5530,3110 5530,3140 Rfbg.1
Vref: Cref.2 D1.2 Rp.2 Rss.2 RT.2 T1.2 TP6.1 U2.5 U5.8 | length 3934.1
  Bottom Layer w28: Rp.2 3935.17,1875 3998.67,1811.5 4051.33,1811.5 4114.83,1875 T1.2@4655,1875 ; Rp.2@3645,1865 RT.2 3645,2028.77 3655,2038.77 Cref.2 3655,2270 U5.8 ; T1.2 4765.17,1860 4828.67,1796.5 4881.33,1796.5 4889.83,1805 D1.2 5035,1800 Rss.2 5265,1800 TP6.1 5270,1935 5270,2594.37 5286.4,2610.77 5329.51,2610.77 5423,2704.26 5423,2866.6 5439.4,2883 5739.52,2883 5755.92,2899.4 5755.92,2980.92 U2.5
Vsense: CsnA.1 CsnB.1 Q1.3 Q2.3 RbleedA.2 RbleedB.2 Rcsf.1 Rsense.1 | length 3549.3
  Bottom Layer w28: Q1.3 Q1.3@3795.53,3975.5 ; CsnA.1 3884.76,4185.24 3884.76,4153.31 3885,4153.07 ; RbleedA.2 4408.83,4015 4430.97,4037.14 4432.14,4037.14 ; Rsense.1 Rsense.1@4490.21,4154.79 ; Rsense.1@4485,4168.07 4500,4153.07 4500,4150 Rsense.1@4509.76,4159.76 ; 4536.69,4159.76 4541.93,4165
  Bottom Layer w70: Q1.3@3795.53,3975.53 3885,4065 ; CsnA.1 3877.41,4195 3902.41,4220 4433.07,4220 4483.25,4169.82 4483.25,4164.16 Rsense.1@4485,4164.16 ; 3885,4153.07 3885,4065 ; Rcsf.1 3885,3970 3885,4065 ; 4432.14,4037.14 4490.21,4095.21 Rsense.1@4490.21,4154.79 ; Rsense.1@4509.76,4159.76 4536.69,4159.76 ; 4541.93,4165 4765,4165 4800.47,4129.53 4800.47,4125 4849.97,4075.5 4920.03,4075.5 4964.76,4120.24 4964.76,4123.99 5005.77,4165 5324.47,4165 5365.47,4123.99 5365.47,4121.94 5370,4117.41 RbleedB.2 ; RbleedB.2@5368.25,4119.16 5371.75,4119.16 5371.75,4136.75 5441,4206 5546.03,4206 5560.03,4220 5593.72,4220 5634.72,4261.01 5634.72,4288.92 5661.08,4315.28 5788.92,4315.28 5815.28,4288.92 5815.28,4262.19 5854.16,4223.31 CsnB.1@5854.16,4223.25 ; CsnB.1 5850,4222.54 5865.47,4207.06 5865.47,4160 5899.53,4125.94 5955.93,4069.54 6178.12,4069.54 6234.53,4013.14 6234.53,3970.47 Q2.3@6245.47,3959.53 ; Q2.3@6245.47,3959.5 Q2.3
pads on no net: "Trafo A.1" "Trafo A.3" "Trafo A.5" "Trafo A.6" "Trafo A.7" "Trafo A.9" "Trafo A.11" "Trafo A.13" "Trafo A.14" "Trafo A.15" "Trafo A.17" "Trafo B.2" "Trafo B.4" "Trafo B.5" "Trafo B.6" "Trafo B.8" "Trafo B.10" "Trafo B.11" "Trafo B.12" "Trafo B.14" "Trafo B.16" "Trafo B.18" U2.3 U2.6 U3.12 U3.13 U4.10 U4.11

## Text inside footprints (layer, text, board x,y; h text height)
Cdec1: Top Overlay "+" at 4436,3292 h40 r270
Cdec2: Top Overlay "+" at 4436,2997 h40 r270
CinA: Top Overlay "+" at 4216,4492 h40 r270
CinB: Top Overlay "+" at 6191,4577 h40 r270
Co2A: Top Overlay "+" at 4365,1615 h60
Co2B: Top Overlay "+" at 5210,1620 h60
Co3A: Top Overlay "+" at 3771,3497 h40 r270
Co3B: Top Overlay "+" at 5991,3547 h40 r270